# Altium PCB WikiAudio.PcbDoc
Units mil, origin at the board's own origin, x right, y up, seen from the top; angles counter-clockwise.
Board outline 1970 x 1955 mil, 2 copper layers (Top Layer, Bottom Layer); 92 components, 73 nets, 327 pads, 60 vias.
Unrouted connection lines stored in the file: 3.
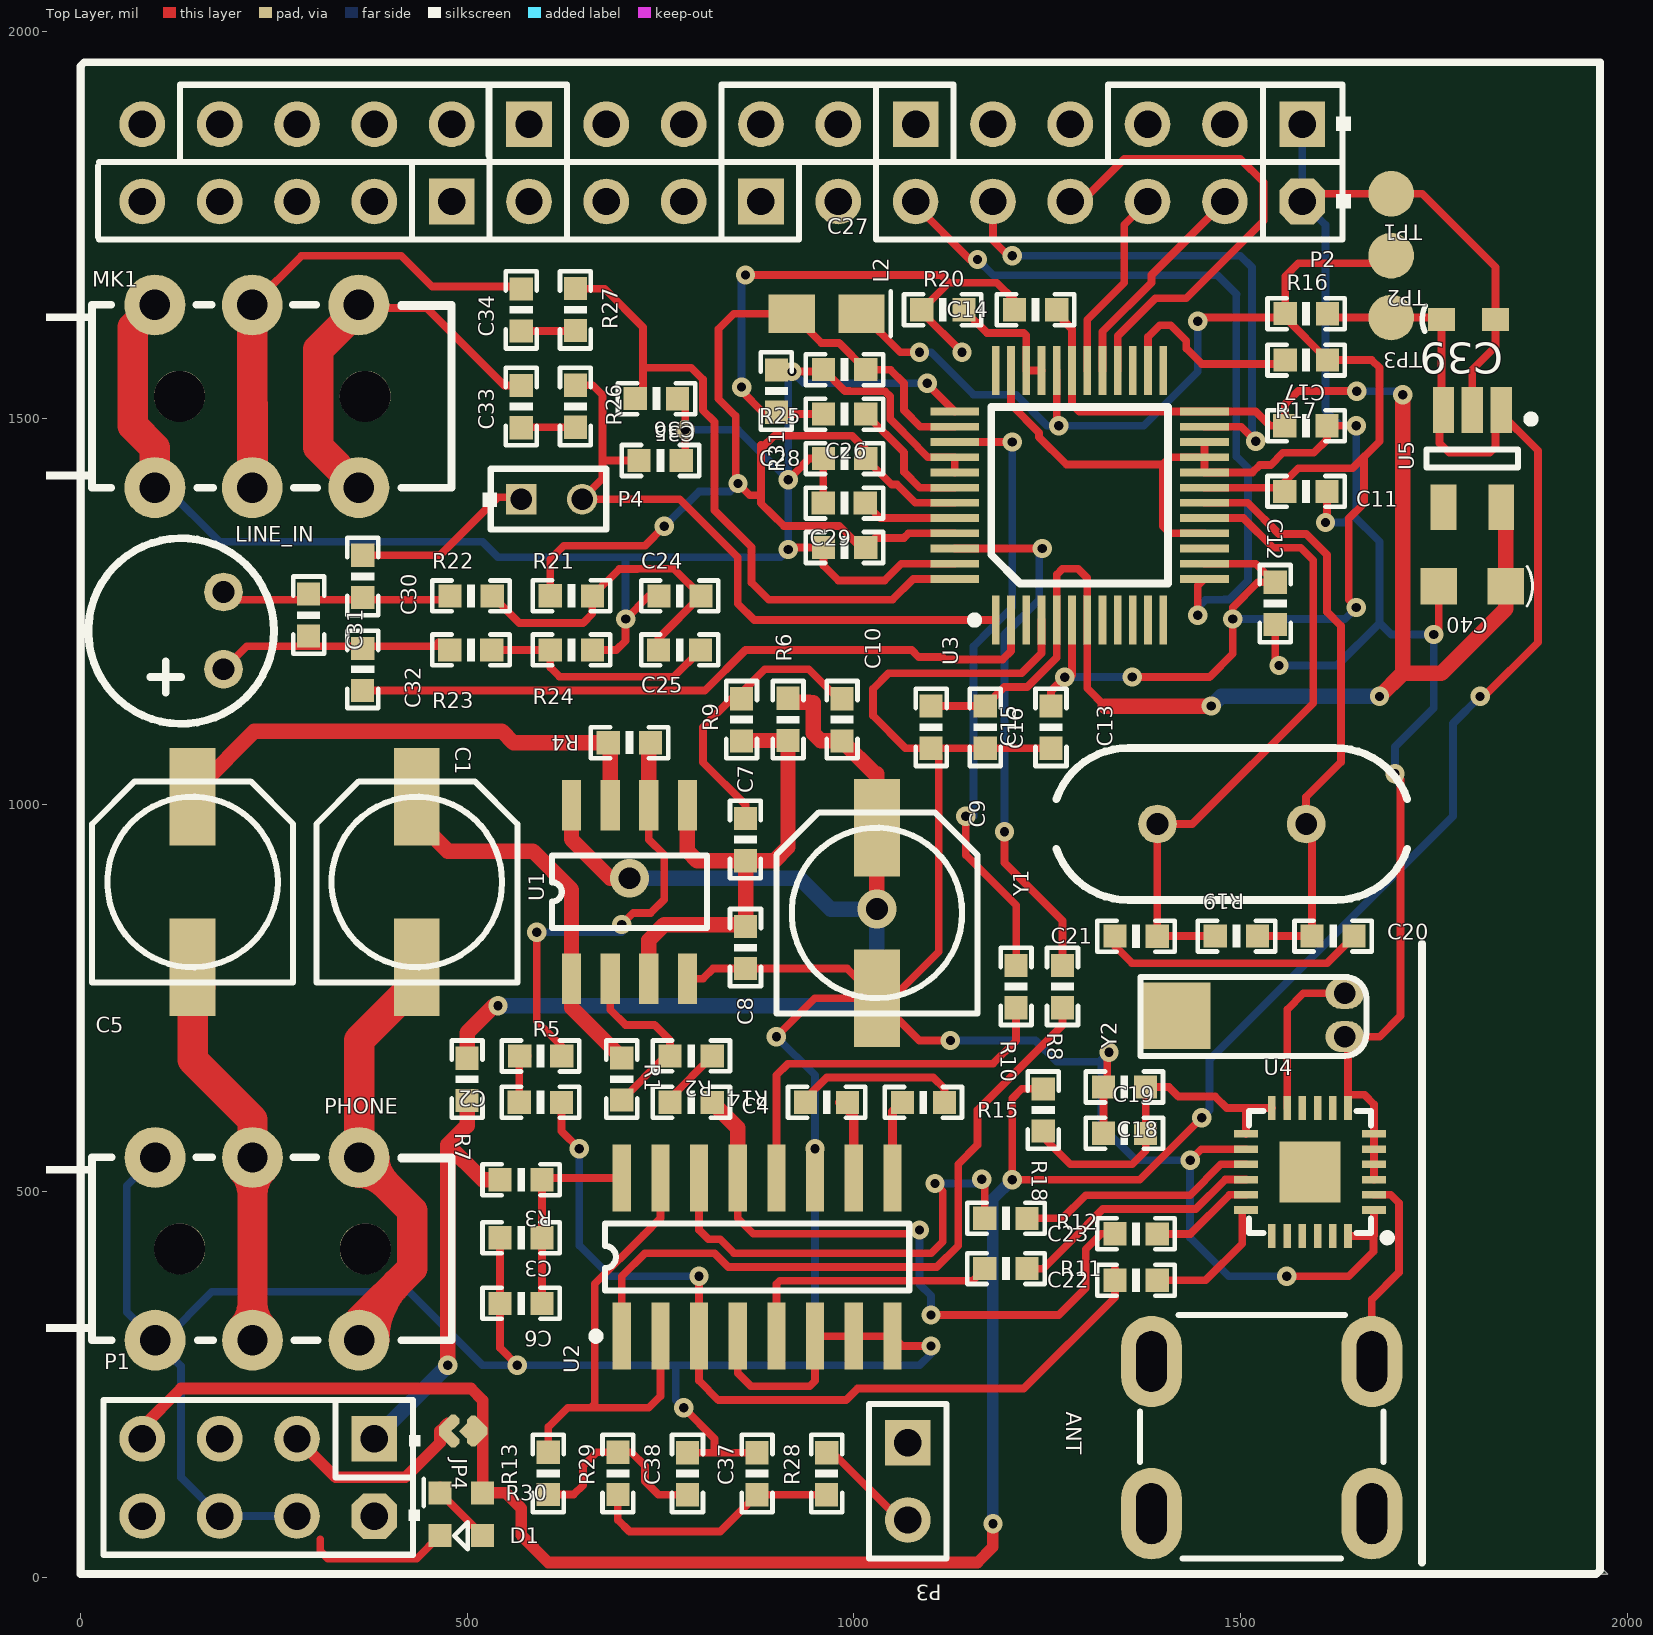
[diagram p0: Top Layer view]
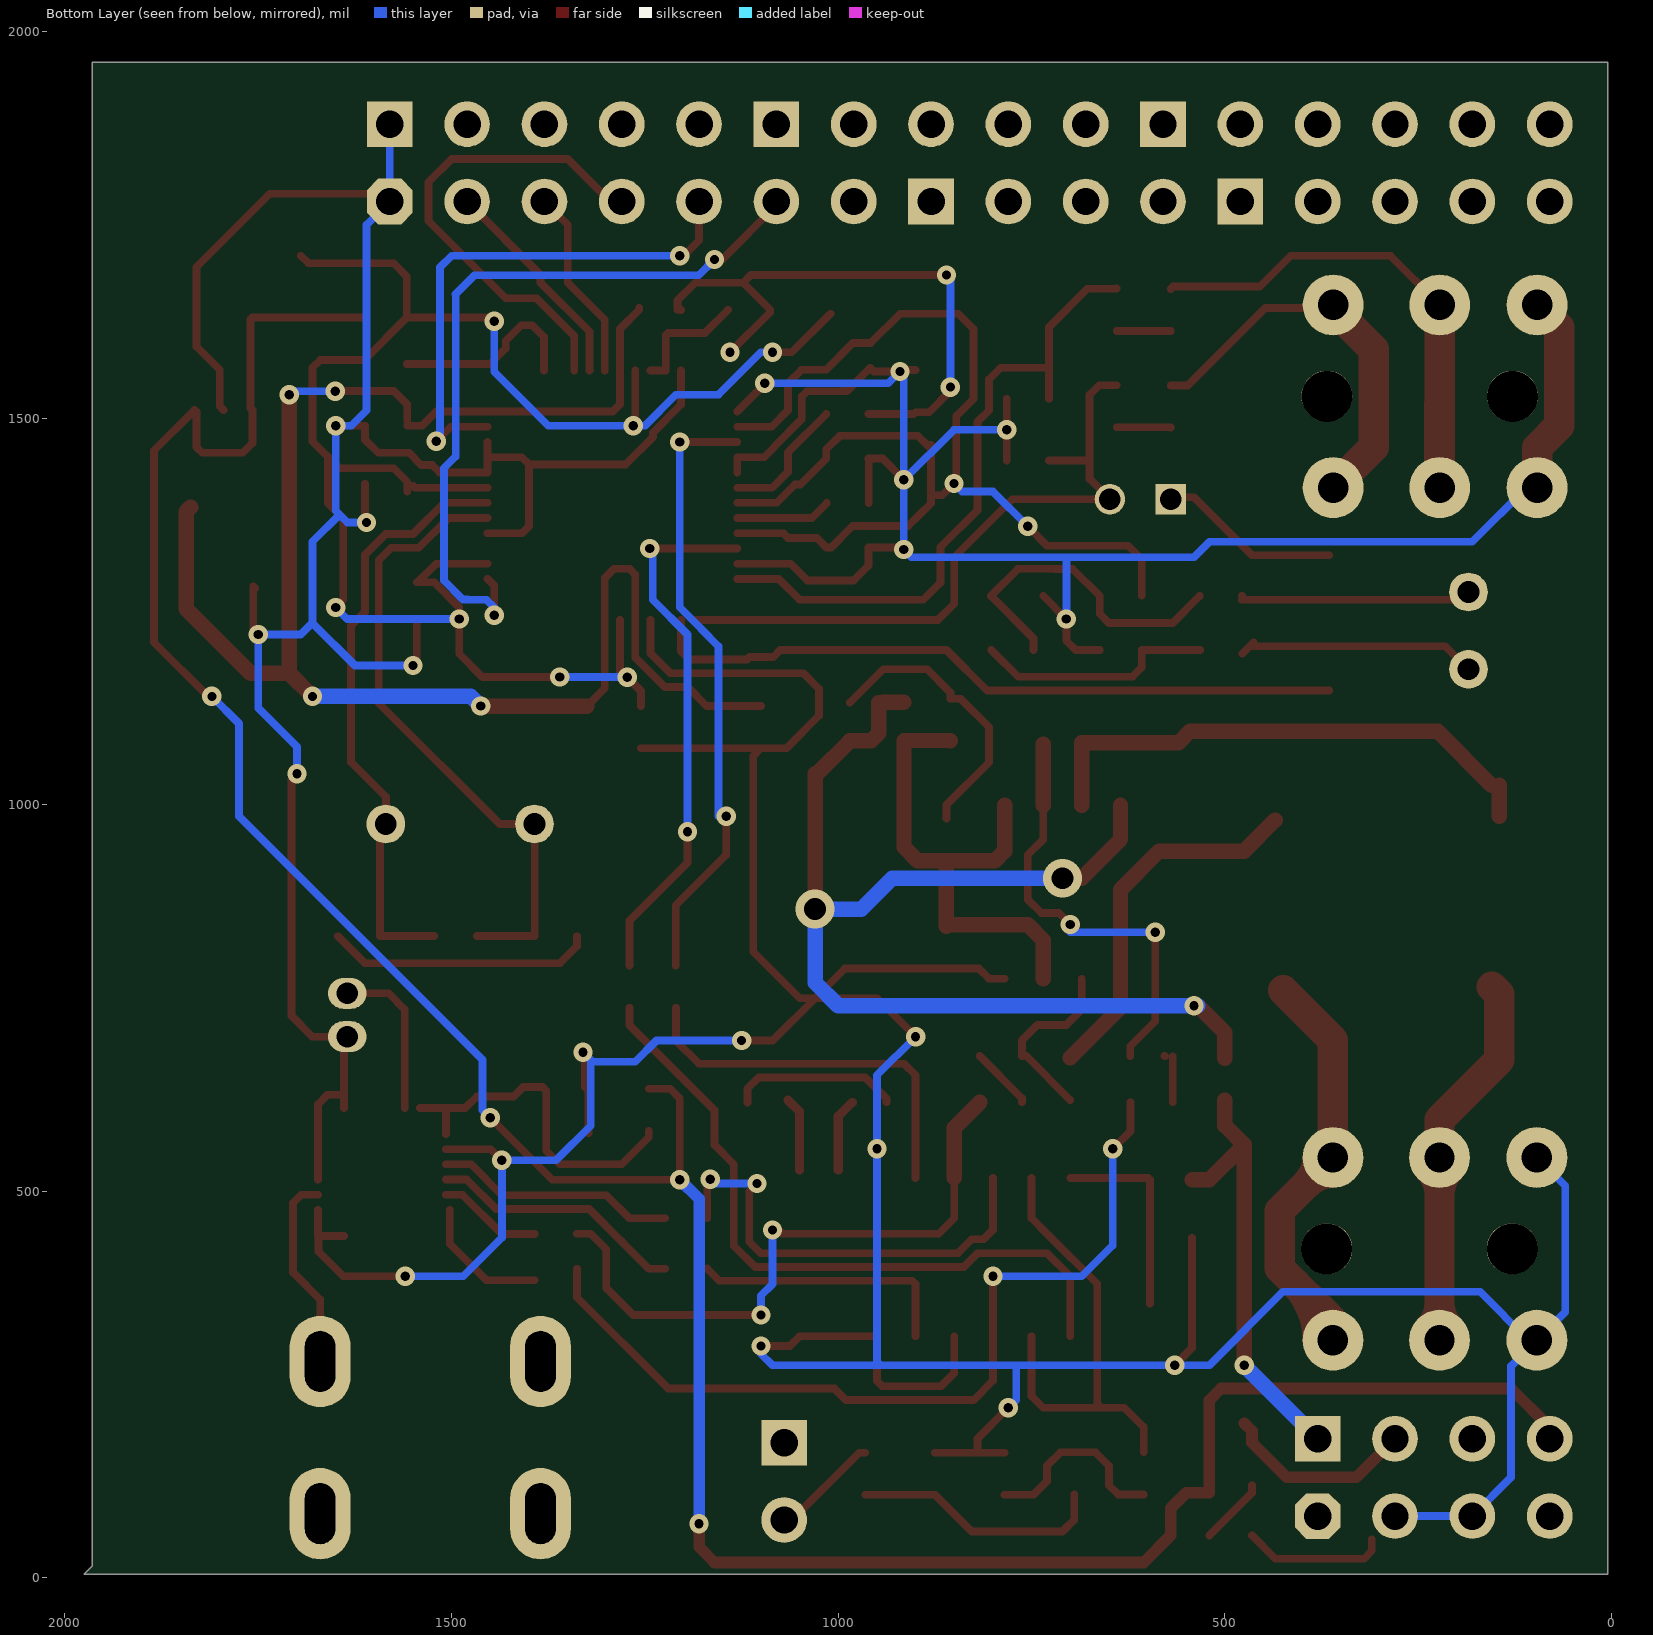
[diagram p1: Bottom Layer view, seen from below]

## Layer stack, top to bottom
Top Solder: solder mask 0.4, Solder Resist, Dk 3.5
Top Layer: signal copper 1.4
Dielectric1: dielectric 12.6, FR-4, Dk 4.8
Bottom Layer: signal copper 1.4
Bottom Solder: solder mask 0.4, Solder Resist, Dk 3.5

## Board outline
5,1960 5,5 1975,5 1965,15 1965,1960

## Design rules (kind name [scope] priority, off if disabled: settings)
Clearance [All] p1: gap=7.87
FabricationTestPointUsage TestPointUsage [All] p1: valid=0 allowmultiple=FALSE
FabricationTestpoint Testpoint [All] p1: side=3 testpointundercomponent=TRUE minsize=40 maxsize=100 preferedsize=60 minholesize=0 maxholesize=40 preferedholesize=32 testpointgrid=1 allowsidetop=TRUE allowsidebottom=TRUE usegrid=TRUE gridtolerance=0.01
PolygonConnect [All] p1: connectstyle=Relief reliefconductorwidth=10 reliefentries=4 polygonreliefangle="90 Angle" airgapwidth=10
RoomDefinition WikiAudio [InComponentClass('WikiAudio')] p1: confinementstyle=ConfineIn formatcopy=TRUE lockcomponents=FALSE outline 1965,1960 -85,1960 -85,-5 1965,-5
RoutingVias [All] p1: holewidth=12 width=25 viastyle="Through Hole" minholewidth=10 minwidth=25 maxholewidth=28 maxwidth=50
SilkToSolderMaskClearance SilkscreenOverComponentPads [IsPad] p1: minsilkscreentomaskgap=10 clearancetoexposedcopper=TRUE
SolderMaskExpansion [All] p1: expansion=4
Width [All] p1: maxlimit=78.74 minlimit=10 preferedwidth=10
27 further rules are at their usual default settings.

## Components (designator, comment, footprint, x,y, rotation, side; value= is the part's Value field where it differs from the comment)
ANT "PCB-11" PCB-11 1670,280 r180 top
C1 "220uF" CC6.56.5 435,900 r270 top
C2 "1UF" 0603P 595,615 r180 top
C3 "10UF" 0603P 570,440 r180 top
C4 "1UF" 0603P 790,615 r180 top
C5 "220uF" CC6.56.5 145,900 r270 top
C6 "104" 0603P 570,355 r180 top
C7 "10UF" 0603P 860,955 r270 top
C8 "10UF" 0603P 860,815 r90 top
C9 "220uF" CC6.56.5 1030,860 r270 top
C10 "104" 0603P 985,1110 r270 top
C11 "104" 0603P 1585,1405 r180 top
C12 "104" 0603P 1545,1260 r90 top
C13 "104" 0603P 1255,1100 r90 top
C14 "104" 0603P 1235,1640 r0 top
C15 "104" 0603P 1100,1100 r90 top
C16 "104" 0603P 1170,1100 r90 top
C17 "104" 0603P 1585,1490 r180 top
C18 "104" 0603P 1350,635 r0 top
C19 "10UF" 0603P 1350,575 r0 top
C20 "22" 0603P 1620,830 r180 top
C21 "22" 0603P 1365,830 r0 top
C22 "1UF" 0603P 1365,385 r0 top
C23 "1UF" 0603P 1365,445 r0 top
C24 "10UF" 0603P 775,1270 r0 top
C25 "10UF" 0603P 775,1200 r180 top
C26 "104" 0603P 988,1332.63 r0 top
C27 "104" 0603P 988,1562.63 r0 top
C28 "104" 0603P 988,1447.63 r0 top
C29 "1UF" 0603P 988,1390 r180 top
C30 "1UF" 0603P 365,1295 r90 top
C31 "1UF" 0603P 295,1245 r90 top
C32 "1UF" 0603P 365,1175 r270 top
C33 "1UF" 0603P 570,1515 r270 top
C34 "1UF" 0603P 570,1640 r270 top
C35 "103" 0603P 745,1525 r180 top
C36 "103" 0603P 750,1445 r180 top
C37 "102" 0603P 875.03,135 r270 top
C38 "101" 0603P 785.06,135 r270 top
C39 "100nF" C0603L 1795,1627.6 r0 top
C40 "10uF" C0805 1800,1282.6 r180 top
D1 "RED" 0603pn 520,55 r180 top
JP4 "Jumper2-2" JP2_SMD 495,190 r0 top
L2 "10uH" 0805 1010,1635 r180 top
LINE_IN "LINE_IN" PHONE_ST 228.11,1528.11 r180 top
MK1 "Mic2" Mic-6050 130,1225 r90 top
P1 "WIKIPWR-8P" WIKIPWR-8P 380,180 r180 top
P2 "WIKIPRHL-R" WIKIPRHL-R 1580,1880 r180 top locked
P3 "DAC" HDR1X2 1070,175 r270 top
P4 "MIC/LINE" HDR1X2/2.00MM 570,1395 r0 top
PHONE "PHONE_M" PHONE_ST 228.38,425.59 r180 top
R1 "10K" 0603P 700,645 r90 top
R2 "10K" 0603P 790,675 r180 top
R3 "10R" 0603P 570,515 r180 top
R4 "10K" 0603P 710,1080 r180 top
R5 "10K" 0603P 595,675 r0 top
R6 "10K" 0603P 915,1110 r90 top
R7 "10R" 0603P 500,645 r270 top
R8 "1K" 0603P 1270,765 r270 top
R9 "10K" 0603P 855,1110 r270 top
R10 "1K" 0603P 1210,765 r270 top
R11 "1K" 0603P 1197,400 r180 top
R12 "1K" 0603P 1197,465 r180 top
R13 "1K" 0603P 605,135 r90 top
R14 "10K" 0603P 965,615 r180 top
R15 "10K" 0603P 1090,615 r0 top
R16 "0R" 0603P 1585,1635 r0 top
R17 "100K" 0603P 1585,1575 r0 top
R18 "10R" 0603P 1245,605 r90 top
R19 "1M" 0603P 1495,830 r180 top
R20 "100K" 0603P 1115,1640 r0 top
R21 "1K" 0603P 635,1270 r180 top
R22 "1K" 0603P 505,1270 r0 top
R23 "1K" 0603P 505,1200 r180 top
R24 "1K" 0603P 635,1200 r180 top
R25 "1K" 0603P 988,1505.13 r0 top
R26 "510" 0603P 640,1515 r90 top
R27 "510" 0603P 640,1640 r90 top
R28 "4.7K" 0603P 965,135 r270 top
R29 "47K" 0603P 694.97,135 r90 top
R30 "1K" 0603M 465,110 r0 top
R31 "0R" 0603P 900,1535 r270 top
TP1 "TEST POINT" TP-1.5 1695,1790 r180 top
TP2 "TEST POINT" TP-1.5 1695,1710 r270 top
TP3 "TEST POINT" TP-1.5 1695,1629.94 r270 top
U1 "TDA1308T" SOP-8 635,775 r90 top
U2 "74HC4052" SOP16M 875,415 r0 top
U3 "VS1053B/VS1003B" mTQFP48 1235,1405 r90 top
U4 "RDA5820" QFN24 1590,525 r180 top
U5 "LDO-2.5" SOT23-5 1800,1447.6 r270 top
Y1 "12.288MHz" XTAL_US 1585,975 r180 top
Y2 "32.768KHz" XTAL32 1635,700 r180 top

## Footprints (in the part's own frame and the unit in brackets; to place one, negate y for a bottom-side part, rotate by r counter-clockwise, add the part's x,y. Pads: shape width x height; smd on the part's side, far side on the other; paste and mask are expansions set on the pad)
0603M [mil]
  rect 30x30 smd: 1(0,0) 2(55,0)
  silkscreen extent -21,-17 -21,18, body extent -5,-15 60,15, height 43
0603P [mil]
  rect 30x30 smd: 1(-27,0) 2(27.5,-0.06)
  silkscreen extent -50,-20 50,20
0603pn [mil]
  rect 30x30 smd: 1(0,0) 2(55,0)
  silkscreen extent 19,-17 36,18
0805 [mil]
  rect 60x50 smd: 1(0,0) 2(90,0)
  silkscreen extent -38,-29 -38,29
C0603L [mil]
  rect 35x30 smd: 1(-35,0) 2(35,0)
  silkscreen extent -60,-16 -56,18, body extent -31,-16 32,15, height 24
C0805 [mm]
  rect 1.2x1.2 smd: 1(-1.1,0) 2(1.1,0)
  silkscreen extent -1.97,-0.65 -1.8,0.65, body extent -0.99,-0.61 1.01,0.59, height 1.2
CC6.56.5 [mm]
  rect 3.2x1.5 smd: 1(-2.794,0) 2(2.8,0)
  silkscreen extent -3.3,-3.3 3.3,3.3
HDR1X2 [mm]
  rect 1.5x1.5 hole 0.9: 1(0,0)
  round 1.5 hole 0.9: 2(2.54,0)
  silkscreen extent -1.27,-1.27 3.81,1.27
HDR1X2/2.00MM [mm] "Connector; Header; 2 Position"
  rect 1x1 hole 0.7: 1(0,0)
  round 1 hole 0.7: 2(2,0)
  silkscreen extent -1.27,-1 2.79,1
JP2_SMD [mil]
  oct 15x30 smd rot 45: 1(-18,-8) 2(18,7)
  oct 15.75x30 smd rot 135: 1(-18,8)
  rect 26x26 smd rot 45: 2(13,0)
  oct 15x30 smd rot 135: 2(18,-7)
Mic-6050 [mil] "Mic 6050"
  round 50 hole 28: 1(-50,-55) 2(50,-55)
  silkscreen extent -120,-120 120,120
mTQFP48 [mm]
  rect 1.6x0.254 smd: 1(-4.223,1.3) 2(-4.223,0.8) 3(-4.223,0.3) 4(-4.223,-0.2) 5(-4.223,-0.7) 6(-4.223,-1.2) 7(-4.223,-1.7) 8(-4.223,-2.2) 9(-4.223,-2.7) 10(-4.223,-3.2) 11(-4.223,-3.7) 12(-4.223,-4.2) 25(3.977,-4.2) 26(3.977,-3.7) 27(3.977,-3.2) 28(3.977,-2.7) 29(3.977,-2.2) 30(3.977,-1.7) 31(3.977,-1.2) 32(3.977,-0.7) 33(3.977,-0.2) 34(3.977,0.3) 35(3.977,0.8) 36(3.977,1.3)
  rect 0.254x1.6 smd: 13(-2.873,-5.55) 14(-2.373,-5.55) 15(-1.873,-5.55) 16(-1.373,-5.55) 17(-0.873,-5.55) 18(-0.373,-5.55) 19(0.127,-5.55) 20(0.627,-5.55) 21(1.127,-5.55) 22(1.627,-5.55) 23(2.127,-5.55) 24(2.627,-5.55) 37(2.627,2.65) 38(2.127,2.65) 39(1.627,2.65) 40(1.127,2.65) 41(0.627,2.65) 42(0.127,2.65) 43(-0.373,2.65) 44(-0.873,2.65) 45(-1.373,2.65) 46(-1.873,2.65) 47(-2.373,2.65) 48(-2.873,2.65)
  silkscreen extent -4.35,-4.35 2.78,2.12
PCB-11 [mm]
  oval 2x3 hole 1 slot 2 at 90 deg: 1(0,0) 2(7.239,0) 3(7.239,5) 4(0,5)
  silkscreen extent -0.38,-1.52 7.62,6.48
PHONE_ST [mm]
  round 1.676 hole 1.676: 0(-3.556,0) 0(2.54,0)
  round 2 hole 1: 1(-3.35,3) 1(-3.35,-3) 2(0.15,-3) 2(0.15,3) 3(3.35,3) 3(3.35,-3)
  silkscreen extent -6.39,-3.01 7.49,3
QFN24 [mm]
  rect 2x2 smd: 0(0,0)
  rect 0.8x0.25 smd: 1(-2.101,1.25) 2(-2.101,0.75) 3(-2.101,0.25) 4(-2.101,-0.25) 5(-2.101,-0.75) 6(-2.101,-1.25) 13(2.101,-1.25) 14(2.101,-0.75) 15(2.101,-0.25) 16(2.101,0.25) 17(2.101,0.75) 18(2.101,1.25)
  rect 0.25x0.8 smd: 7(-1.25,-2.101) 8(-0.75,-2.101) 9(-0.25,-2.101) 10(0.25,-2.101) 11(0.75,-2.101) 12(1.25,-2.101) 19(1.25,2.101) 20(0.75,2.101) 21(0.25,2.101) 22(-0.25,2.101) 23(-0.75,2.101) 24(-1.25,2.101)
  silkscreen extent -2.66,-2 2,2.28
SOP16M [mm]
  rect 0.6x2.2 smd: 1(-4.445,-2.6) 2(-3.175,-2.6) 3(-1.905,-2.6) 4(-0.635,-2.6) 5(0.635,-2.6) 6(1.905,-2.6) 7(3.175,-2.6) 8(4.445,-2.6) 9(4.445,2.6) 10(3.175,2.6) 11(1.905,2.6) 12(0.635,2.6) 13(-0.635,2.6) 14(-1.905,2.6) 15(-3.175,2.6) 16(-4.445,2.6)
  silkscreen extent -5.42,-2.72 5,1.1
SOP-8 [mil]
  rect 65x25 smd: 1(0,0) 2(0,-50) 3(0,-100) 4(0,-150) 5(224.41,-150) 6(224.41,-100) 7(224.41,-50) 8(224.41,0)
  silkscreen extent 65,-175 159,25
SOT23-5 [mm]
  rect 1.5x0.7 smd: 1(-1.595,0.95) 2(-1.595,0) 3(-1.595,-0.95)
  rect 1.5x0.85 smd: 4(1.595,-0.95) 5(1.595,0.95)
  silkscreen extent -1.42,-1.5 0.3,2.05, body extent -1.39,-1.46 1.41,1.44, height 1.09
TP-1.5 [mm]
  round 1.5 smd: 1(0,0)
WIKIPRHL-R [mm] "Connector; Header; 16x2 Position"
  rect 1.5x1.5 hole 0.9: 1(0,0) 11(12.7,0) 16(17.78,2.54) 21(25.4,0) 24(27.94,2.54)
  oct 1.5x1.5 hole 0.9: 2(0,2.54)
  round 1.5 hole 0.9: 3(2.54,0) 4(2.54,2.54) 5(5.08,0) 6(5.08,2.54) 7(7.62,0) 8(7.62,2.54) 9(10.16,0) 10(10.16,2.54) 12(12.7,2.54) 13(15.24,0) 14(15.24,2.54) 15(17.78,0) 17(20.32,0) 18(20.32,2.54) 19(22.86,0) 20(22.86,2.54) 22(25.4,2.54) 23(27.94,0) 25(30.48,0) 26(30.48,2.54) 27(33.02,0) 28(33.02,2.54) 29(35.56,0) 30(35.56,2.54) 31(38.1,0) 32(38.1,2.54)
  silkscreen extent -1.6,-1.3 39.55,3.78, body extent -1.3,-1.63 39.43,4.04, height 8.51
WIKIPWR-8P [mm] "Connector; Header; 4x2 Position"
  rect 1.5x1.5 hole 0.9: 1(0,0)
  oct 1.5x1.5 hole 0.9: 2(0,2.54)
  round 1.5 hole 0.9: 3(2.54,0) 4(2.54,2.54) 5(5.08,0) 6(5.08,2.54) 7(7.62,0) 8(7.62,2.54)
  silkscreen extent -1.52,-1.27 8.89,3.81, body extent -1.28,-1.65 8.81,4.07, height 8.51
XTAL32 [mil]
  oval 50x40 hole 28: 1(0,0) 2(0,-56)
  rect 92.13x86 smd: ""(220,-27)
  silkscreen extent -28,-77 264,25
XTAL_US [mil]
  round 50 hole 28: 1(0,0) 2(192.13,0)
  silkscreen extent -131,-98 323,98

## Part data
ANT: "PCB接线端子"
C1 C5 C9: library part CAP
C2 C3 C4 C6 C7 C8 C10 C11 C12 C13 C14 C15 C16 C17 C18 C19 C20 C21 C22 C23 C24 C25 C26 C27 C28 C29 C30 C31 C32 C33 C34 C35 C36 C37 C38: library part C
C39 C40: library part Cap, "Capacitor"
D1: library part LED0, "Typical INFRARED GaAs LED"
JP4: "Jumper2"
L2: library part Inductor, "Inductor"
LINE_IN: library part PHONE_M
MK1: "Microphone"
P1: "PWR HDR"
P2: "Header, 16-Pin, Dual row"
P3 P4: library part "Header 2", "Header, 2-Pin"
R1 R2 R3 R4 R5 R6 R7 R8 R9 R10 R11 R12 R13 R14 R15 R16 R17 R18 R19 R20 R21 R22 R23 R24 R25 R26 R27 R28 R29 R31: library part R
R30: library part Res2, "Resistor"
TP1 TP2 TP3: library part TEST-POINT, "测试点"
U1: library part TDA1308
U2: library part CD4052
U3: library part VS1053
U5: library part LDO-SOT23-5, "General LDO SOT23-5"
Y1: library part XTAL_2, "Crystal Oscillator"
Y2: library part XTAL_3, "32.768K"

## Via types
v1: diameter 25, hole 12, Top Layer to Bottom Layer, 58 vias
v2: diameter 50, hole 28, Top Layer to Bottom Layer, 2 vias

## Nets (pads, with @x,y where several pads share a name; then routed paths per layer and width w, separated by ;. In a path a pad name is that pad's centre, name@x,y a point inside that pad or via, vN(x,y) a via of type N, cw(c..) or ccw(c..) an arc to the next point about the centre after c; other vN are vias at no path point)
"A OUTL": C2.2 R5.1 | length 60.1
  Top Layer w10: C2.2 R5.1@567.5,674.5 ; R5.1@577.5,674.5 R5.1@578,675
"A OUTR": C4.2 R2.1 | length 82.5
  Top Layer w10: C4.2 762.5,620.5 R2.1
AGND: C24.1 C26.1 C27.1 C28.1 C29.2 C35.1 C36.1 LINE_IN.3 R24.1 R31.1 U3.37 U3.40 U3.41 U3.47 | length 2720.8
  Top Layer w10: R24.1 693,1200 705,1212 v1(705,1240) C24.1@735,1270 ; C36.1@782,1445 v1(782,1485) C35.1@782,1525 ; R31.1 918.26,1562 v1(920.13,1560.13) 953.76,1560.13 958.63,1565 C27.1 988.63,1535 994.86,1535 995.17,1534.69 1040.31,1534.69 1047.13,1527.87 1047.13,1498.72 1082.87,1462.97 1082.87,1462.15 1095.65,1449.37 U3.40 U3.41 ; v1(915.26,1330) 912.63,1332.63 C26.1 961,1309 980,1290 1040,1290 1061.58,1311.58 U3.47 ; v1(915.26,1420) 915.26,1420.26 942.63,1447.63 C28.1 960.5,1447.13 C29.2 ; v1(1095,1545) 1094.09,1545 U3.37
  Top Layer w39.37: LINE_IN.3@96.22,1410 96.22,1461.62 67.55,1490.29 67.55,1617.55 LINE_IN.3@96.22,1646.22
  Bottom Layer w10: LINE_IN.3@96.22,1410 110,1410 180,1340 520,1340 540,1320 705,1320 ; v1(705,1240) 705,1320 ; v1(782,1485) 850.26,1485 v1(915.26,1420) ; v1(1095,1545) 935.26,1545 v1(920.13,1560.13) 915.26,1555.26 v1(915.26,1420) ; 705,1320 905.26,1320 v1(915.26,1330) v1(915.26,1420)
AREF: C7.2 C8.2 R6.1 R9.2 U1.3 U1.5 | length 669.5
  Top Layer w20: U1.3 735,825 755,845 857.56,845 C8.2 860.06,927.37 C7.2 ; U1.5 785,940 797.5,927.5 C7.2 ; R9.2 855.44,1083 R6.1 915,945 897.5,927.5 C7.2
"ASEL A": R14.1 U2.10 | length 95.1
  Top Layer w11.81: R14.1@982,615 1000,597 U2.10@1000,527.36
"ASEL B": R15.1 U2.9 | length 96.9
  Top Layer w11.81: U2.9@1050,527.36 1050,603 R15.1@1065,618
AVDD: C26.2 C27.2 C28.2 L2.2 R21.2 U3.38 U3.43 U3.45 | length 1611.7
  Top Layer w10: R21.2 607.5,1317.5 625,1335 730,1335 v1(755,1360) ; 880,1465 880,1400 ; 882.5,1462.5 897.19,1477.19 997.81,1477.19 1015.5,1459.5 C28.2 1049.12,1413.94 1056.06,1413.94 1079.68,1390.32 U3.43 ; U3.45 1070.95,1350.95 1065,1345 1027.94,1345 C26.2 1009.27,1332.56 981.33,1360.5 909.5,1360.5 894.75,1375.25 880,1390 880,1400 ; U3.38 1086.26,1488.74 1065,1510 1065,1545 1047.44,1562.56 C27.2 980.94,1597.13 957.87,1597.13 L2.2 845,1635 825,1615 825,1525 847.5,1502.5 847.5,1418.12 v1(850.37,1415.25) 865.62,1400 880,1400
  Bottom Layer w10: v1(755,1360) 800,1405 840,1405
"CD X0": R10.2 U2.12 | length 503.8
  Top Layer w10: U2.12 900,650 915,665 1180,665 1209.94,694.94 R10.2
"CD X1": R12.2 U2.14 | length 597.4
  Top Layer w10: U2.14 800,450 812.13,437.87 827.4,437.87 845.28,420 1100,420 1115,435 1115,500 v1(1105,510) ; v1(1165.5,515.5) 1169.5,515.5 R12.2
  Bottom Layer w10: v1(1105,510) 1160,510 v1(1165.5,515.5)
"CD XY2": R13.2 U2.2 U2.15 | length 606.5
  Top Layer w10: R13.2 605.06,195.06 630,220 660,220 ; U2.2 750,235 735,220 660,220 ; U2.15 750,465 727.87,442.87 727.6,442.87 665,380.28 665,225 660,220
"CD Y0": R8.2 U2.1 | length 907.3
  Top Layer w10: U2.1 700,390 730,420 820,420 837.87,402.13 1107.4,402.13 1135,429.72 1135,535 1160,560 1160,605 1269.94,714.94 R8.2
"CD Y1": R11.2 U2.5 | length 345.2
  Top Layer w10: U2.5 900,380 904.25,384.25 1153.69,384.25 R11.2
CVDD: C14.2 C15.2 C16.2 C17.2 C40.1 U3.5 U3.7 U3.24 U3.31 U5.5 | length 2188.6
  Top Layer w10: C15.2 C16.2 1194.69,1152.13 1224.32,1152.13 1262.56,1190.37 U3.5 1262.56,1297.56 1270,1305 1290,1305 1301.93,1293.07 U3.7 1301.93,1150.57 1325,1127.5 ; C14.2@1257.5,1642.5 1257.5,1639.94 1282.24,1615.19 U3.31 1282.24,1517.76 1291.57,1508.43 U3.24 1520,1508.43 1538.36,1490.06 C17.2 ; C17.2@1557.5,1495.06 1557.5,1517.5 1575,1535 1650,1535 v1(1650.44,1534.56)
  Top Layer w20: 1325,1127.5 v1(1462.5,1127.5) ; v1(1680,1140) 1710,1170 ; v1(1710,1530) 1710,1170 ; U5.5 1843.31,1378.9 C40.1 1843.31,1253.31 1760,1170 1710,1170
  Bottom Layer w10: v1(1650.44,1534.56) 1705.44,1534.56 v1(1710,1530)
  Bottom Layer w20: v1(1462.5,1127.5) 1475,1140 v1(1680,1140)
D3V3: R14.2 R15.2 | length 219.6
  Top Layer w10: R14.2 937.5,619.63 965,647.13 1102.87,647.13 1117.5,632.5 R15.2
D5V: P1.1 R3.2 R7.2 | length 573.3
  Top Layer w20: v1(475,275) 475,560 ; R7.2 499.94,584.94 475,560 ; R3.2 519.94,515.06 475,560
  Bottom Layer w20: P1.1 v1(475,275)
GBUF: R25.2 U3.42 | length 169.4
  Top Layer w10: R25.2 1065,1455.56 1065,1430.28 1085.28,1410 U3.42
GND: C3.2 C6.2 C7.1 C8.1 C9.2 C10.1 C11.1 C12.1 C13.1 C14.1 C15.1 C16.1 C17.1 C18.1 C19.1 C20.1 C21.1 C37.1 C38.1 C39.2 C40.2 D1.2 P1.4 P1.6 P2.1 P2.2 PHONE.3 R9.1 R20.1 R25.1 R31.2 TP1.1 U1.4 U2.4 U2.6 U2.7 U2.8 U2.11 U3.4 U3.16 U3.20 U3.21 U3.22 U3.35 U4.1 U4.3 U4.4 U4.5 U4.6 U4.7 U4.14 U4.24 U5.2 Y2.1 | length 10179.6
  Top Layer w10: C3.2 C6.2 542.5,297.5 v1(565,275) ; v1(780,220) 820,180 820,162 ; U1.4 805,775 818,788 C8.1 991.76,788 C9.2 ; C38.1 820,162 ; U2.4 850,265 867.13,247.87 942.87,247.87 950,255 U2.6 U2.8 1062.64,300 v1(1100,300) ; v1(855,1540) 855,1535 882.5,1507.5 R31.2 902.31,1505.13 R25.1 ; C7.1 860,1000 805,1055 805,1100 842,1137 R9.1 855,1145 885,1175 942,1175 C10.1@985,1132 ; v1(860,1685) 1113,1685 1123,1675 ; C37.1 820,162 ; v1(900,700) 949.76,749.76 C9.2 ; v1(1125,695) 1084.76,695 C9.2 ; v1(1140,1585) 1088,1637 R20.1 1123,1675 ; C14.1@1203,1640 C14.1@1203.5,1639.5 ; U3.35 1203.5,1517.24 1239.63,1481.12 1239.63,1475.37 1275,1440 1400,1440 ; C14.1 1208,1652 1185,1675 1123,1675 ; U3.4 1242.87,1195.96 1216.91,1170 1045,1170 1025,1150 1025,1115 1067,1073 C15.1 ; C13.1 C15.1 ; C19.1 1323,630 1328,635 1328,678 v1(1330,680) ; C21.1 1338,817 1360,795 1612,795 C20.1 ; v1(1435,540) 1449.25,554.25 1449.25,554.53 U4.14 ; U3.16 1409.05,1350.95 1400,1360 1400,1440 ; U3.22 U3.21 ; C12.1 1545,1185 v1(1550,1180) ; v1(1560,390) 1640,390 1672.28,422.28 1672.28,442.28 ; P2.2 1590,1790 1735,1790 1830,1695 C39.2 1830,1592.6 1800,1562.6 1800,1515.39 U5.2@1795,1510.39 ; v1(1610,1365) 1612,1367 C11.1@1612,1415 ; Y2.1 Y2.1@1639.21,700 ; U4.24 1672.28,442.28 ; U4.7 Y2.1@1639.21,700 ; 1645,625 1660.45,625 1672.72,612.72 U4.4 U4.3 ; v1(1650,1490) C17.1 1612,1472 1595,1455 1555,1455 1539.12,1439.12 1525,1439.12 1515.57,1429.69 U3.20 U3.21 ; U4.1 1672.72,442.72 1672.28,442.28 ; v1(1700,1040) 1707,1033 1707,727 1680,700 Y2.1@1639.21,700 ; v1(1750,1220) 1756.69,1226.69 C40.2 C40.2@1754.13,1280.03 ; C9.2 1049.76,749.76 1110,810 1110,1063 C15.1 ; 1400,1440 1409.37,1449.37 U3.21
  Bottom Layer w10: PHONE.3@96.49,543.7 60,507.2 60,343.97 PHONE.3@96.49,307.48 ; P1.4 P1.6 130,130 130,273.97 PHONE.3@96.49,307.48 ; v1(780,220) 770,230 770,275 ; v1(855,1540) 855,1685 v1(860,1685) ; v1(900,700) 950,650 v1(950,555) 950,280 945,275 ; v1(1100,300) 1100,290 1085,275 945,275 ; v1(1125,695) 1235,695 1262.5,667.5 1317.5,667.5 1320,670 ; v1(1330,680) 1320,670 ; v1(1550,1180) 1625,1180 1680,1235 ; v1(1560,390) 1485,390 1435,440 v1(1435,540) 1365,540 1320,585 1320,670 ; P2.1 P2.2 1610,1750 1610,1510 1630,1490 v1(1650,1490) 1650,1380 1645,1375 ; v1(1610,1365) 1635,1365 1645,1375 ; v1(1700,1040) 1700,1075 1750,1125 v1(1750,1220) 1695,1220 1680,1235 ; PHONE.3@96.49,307.48 107.48,307.48 170,370 425,370 520,275 v1(565,275) 770,275 ; 770,275 945,275 ; 1645,1375 1680,1340 1680,1235
"IIC SCL": U4.9
"IIC SDA": U4.10
IOVDD: C11.2 C12.2 C13.2 L2.1 R16.1 R17.2 TP2.1 U3.6 U3.14 U3.19 U3.32 | length 2425.2
  Top Layer w10: L2.1 1060,1585 v1(1085,1585) ; C13.2 1255.06,1146.99 v1(1272.95,1164.87) ; U3.32 1262.56,1492.44 v1(1265,1490) ; v1@1282.24,1167.24 U3.6 ; v1(1360,1165) 1460,1165 1490,1195 v1(1490,1240) 1490,1255 1522.5,1287.5 C12.2@1544.08,1287.5 ; v1(1445,1625) 1450,1630 1558,1630 R17.2@1612.5,1575.5 ; U3.14 1520,1311.58 C12.2@1544.08,1287.5 ; U3.19 1547.44,1410 C11.2@1550,1412.56 ; C12.2 C12.2@1544.08,1287.5 ; C11.2 1557.5,1417.5 1575,1435 1645,1435 1680,1470 1680,1565 1670.06,1574.94 R17.2 ; R16.1 1558,1683 1575,1700 1685,1700 TP2.1 ; v1(1650,1255) 1640,1265 1640,1370 1660,1390 1660,1450
  Bottom Layer w10: v1(1085,1585) 1100,1585 1155,1530 1210,1530 1250,1490 v1(1265,1490) 1375,1490 1445,1560 v1(1445,1625) ; v1(1272.95,1164.87) 1270.13,1164.87 1270,1165 v1(1360,1165) ; v1(1490,1240) 1635,1240 v1(1650,1255)
LRCK: U3.36
MCLK: U3.25
"MP3 LEFT": R8.1 U3.46 | length 706.1
  Top Layer w10: U3.46 v1(1243.74,1331.26) ; v1(1195,965) 1195,925 1270,850 R8.1
  Bottom Layer w10: v1(1195,965) 1195,1220 1240,1265 1240,1327.52 v1(1243.74,1331.26) v1@1241.26,1331.26
"MP3 RIGHT": R10.1 U3.39 | length 799
  Top Layer w10: U3.39 v1(1205,1469.06) ; v1(1145,985) 1145,935 1210,870 R10.1
  Bottom Layer w10: v1@1155,985 1155,1205 1177.13,1227.13 1177.13,1227.4 1205,1255.28 v1(1205,1469.06)
NetANT_1: ANT.1 ANT.2 ANT.3 ANT.4 U4.2 | length 246.1
  Top Layer w10: ANT.1@1670,290 1670,360 1705,395 1705,485 1694.53,495.47 U4.2
NetC1_1: C1.1 R1.2 U1.1 | length 481.7
  Top Layer w20: C1.1@435,980 475,940 585,940 635,890 U1.1 635,737.56 R1.2
NetC1_2: C1.2 PHONE.1 | length 694
  Top Layer w39.37: PHONE.1@360.27,307.48 360.27,331.83 428.94,400.5 428.94,475.03 360.27,543.7 360.27,695.27 C1.2@424.76,759.76 ; PHONE.1@360.27,524.01 cw(c360.27,476.49) 393.88,510.09 cw(c427.48,543.7) PHONE.1@379.96,543.7 ; PHONE.1@379.96,307.48 cw(c486.28,307.48) 411.1,382.66
NetC3_1: C3.1 C6.1 R3.1 U2.16 | length 264
  Top Layer w10: C6.1 R3.1 599.36,517.36 U2.16
NetC5_1: C5.1 R4.2 U1.7 | length 685.8
  Top Layer w20: C5.1@145,985 C5.1@145,1025 ; C5.1@155,1025 225,1095 545,1095 560,1080 685,1080 U1.7
NetC5_2: C5.2 PHONE.2 | length 642.8
  Top Layer w39.37: C5.2@155,764.76 145,754.76 145,670 222.48,592.52 222.48,543.7 PHONE.2@222.48,307.48 ; PHONE.2@208.56,321.4 ccw(c174.95,355) 222.48,355 ccw(c270,355) PHONE.2@236.4,321.4 ; PHONE.2@208.56,529.78 cw(c174.95,496.17) 222.48,496.17 cw(c270,496.17) PHONE.2@236.4,529.78
NetC18_2: C18.2 C19.2 R18.1 U4.12 U4.13 | length 450.8
  Top Layer w10: R18.1 1245,570 1280,535 1360,535 1377.5,552.5 C19.2 1377.5,629.94 1382.5,634.94 1407.56,634.94 1420,622.5 1467.5,622.5 1482.28,607.72 1509.55,607.72 ; U4.13 1507.28,605.45 1509.55,607.72 ; U4.12 1509.55,607.72
NetC20_2: C20.2 R19.1 U3.18 Y1.1 | length 768.2
  Top Layer w10: U3.18 1509.68,1390.32 1550,1350 1585.28,1350 1612,1323.28 1612,1249.24 1630,1231.24 1630,1055 1585,1010 Y1.1 ; R19.1@1522.44,830 1522.5,830.06 C20.2 Y1.1@1592.5,967.5
NetC21_2: C21.2 R19.2 U3.17 Y1.2 | length 828.8
  Top Layer w10: C21.2 Y1.2@1392.5,974.63 ; Y1.2 1437.87,975 1594.13,1131.25 1594.13,1315.87 1577.87,1332.13 1542.6,1332.13 1504.09,1370.63 U3.17 ; C21.2@1397.37,829.94 1397.5,830.06 R19.2
NetC22_2: C22.2 U4.18 | length 172.9
  Top Layer w10: C22.2 1454.94,384.94 1502.28,432.28 U4.18@1502.28,475.79
NetC23_2: C23.2 U4.17 | length 135.7
  Top Layer w10: C23.2 1435.49,444.94 1486.03,495.47 U4.17
NetC24_2: C24.2 C25.2 R21.1 R22.2 | length 449.1
  Top Layer w10: R22.2 567.44,1235 650,1235 662,1247 R21.1 696.63,1304.63 719.9,1304.63 ; 704.9,1304.63 705.28,1305 767.44,1305 C24.2 747.5,1214.94 C25.2
NetC25_1: C25.1 R23.1 R24.2 | length 312
  Top Layer w10: R23.1 607.44,1200 R24.2 607.5,1177.5 619.63,1165.37 767.37,1165.37 C25.1
NetC29_1: C29.1 U3.44 | length 123.7
  Top Layer w10: C29.1 1034.37,1370.63 U3.44
NetC30_1: C30.1 C31.2 MK1.2 R22.1 | length 297.1
  Top Layer w10: MK1.2 195,1265 R22.1@478,1265
NetC30_2: C30.2 P4.1 | length 233.5
  Top Layer w10: C30.2 465,1322.5 540,1397.5 P4.1@567.5,1397.5
NetC31_1: C31.1 C32.1 MK1.1 R23.2 | length 314.6
  Top Layer w10: MK1.1@185,1170 MK1.1@187.5,1172.5 ; MK1.1 215,1205 R23.2@462.56,1205 ; R23.2@462.56,1210 R23.2@477.5,1195.06
NetC32_2: C32.2 U3.2 | length 909.8
  Top Layer w10: C32.2 807.5,1147.5 860,1200 1075,1200 1084.19,1190.81 1114.87,1190.81 1117.81,1187.87 1192.6,1187.87 1203.5,1198.78 U3.2
NetC33_1: C33.1 LINE_IN.1 | length 533.3
  Top Layer w10: LINE_IN.1@342.53,1642.31 447.69,1642.31 548,1542 C33.1
  Top Layer w39.37: LINE_IN.1@352.71,1633.83 307.55,1588.67 307.55,1462.45 LINE_IN.1@360,1410
NetC33_2: C33.2 R26.1 | length 70.3
  Top Layer w10: C33.2 570.44,1488 R26.1
NetC34_1: C34.1 LINE_IN.2 | length 749.6
  Top Layer w10: LINE_IN.2@224.09,1648.11 285.98,1710 415,1710 455,1670 567,1670 C34.1
  Top Layer w39.37: LINE_IN.2@222.2,1410 LINE_IN.2@222.2,1646.22 ; LINE_IN.2@223.11,1394.09 223.11,1518.11
NetC34_2: C34.2 R27.1 | length 70.3
  Top Layer w10: C34.2 639.5,1612.5 R27.1
NetC35_2: C35.2 R27.2 U3.48 | length 856.3
  Top Layer w10: R27.2 640.37,1667.19 677.81,1667.19 727.5,1617.5 727.5,1565 ; C35.2@727.5,1525.06 727.5,1565 ; U3.48 1076.89,1291.89 1050,1265 890,1265 867.87,1287.13 867.87,1332.78 820,1380.65 820,1495 805,1510 805,1550 790,1565 727.5,1565
NetC36_2: C36.2 P4.2 R26.2 U3.1 | length 873.5
  Top Layer w10: R26.2 662.5,1542.5 675,1530 675,1445 ; C36.2@727.5,1445.06 675.06,1445.06 675,1445 ; U3.1 871.26,1238.74 850,1260 850,1320 775,1395 P4.2 675,1421.26 675,1445
NetC37_2: C37.2 R28.2 R29.1 | length 328.8
  Top Layer w10: R29.1 694.97,75.03 710,60 827.47,60 C37.2 R28.2
NetD1_1: D1.1 R30.1 | length 87.8
  Top Layer w10: R30.1@465,120 R30.1 D1.1
NetJP4_1: JP4.1 P1.3 | length 253.5
  Top Layer w15: P1.3 330,130 420,130 465,175 465,190 JP4.1@475,200
NetR1_1: R1.1 R2.2 U1.2 | length 240.1
  Top Layer w10: U1.2 685,735 705,715 742.5,715 762.5,695 R2.2 757.06,675.06 R1.1
NetR4_1: R4.1 R5.2 U1.6 | length 570.9
  Top Layer w10: v1(590,835) 590,720 622.5,687.5 R5.2 ; v1(700,845) 715,860 737.65,860 755,877.35 755,935 735,955 U1.6
  Top Layer w20: U1.6 R4.1@735,1078
  Bottom Layer w10: v1(590,835) 700,835 v1(700,845)
NetR17_1: R17.1 U3.26 | length 253.5
  Top Layer w10: U3.26 1380.67,1605 1395.67,1620 1410,1620 1430,1600 1430,1590 1450,1570 R17.1@1558,1570
NetR20_2: R20.2 U3.33 U3.34 | length 159.3
  Top Layer w10: R20.2 1172.44,1610 1220,1610 1223.19,1606.81 U3.34 U3.33
NetU4_11: U4.11 Y2.2 | length 210.5
  Top Layer w10: U4.11 1560.47,735 1581.47,756 Y2.2
OUTL: C2.1 C22.1 U2.3 | length 1141.5
  Top Layer w10: C2.1 622,578 v1(645,555) ; v1(800,390) U2.3 800,255 825,230 990,230 1005,245 1220,245 1338,363 1338,400
  Bottom Layer w10: v1(645,555) 645,430 685,390 v1(800,390)
OUTR: C4.1 C23.1 U2.13 | length 836
  Top Layer w10: U2.13 850,465 870,445 1072.13,445 1077.13,450 v1(1085,450) ; v1(1100,340) 1265,340 1300,375 1300,425 1320,445 C23.1
  Top Layer w20: C4.1 850,582 U2.13
  Bottom Layer w10: v1(1085,450) 1085,380 1100,365 v1(1100,340)
PVDD: C39.1 JP4.2 P1.7 R16.2 R18.2 R30.2 TP3.1 U5.1 U5.3 | length 3801.2
  Top Layer w10: R18.2 1217.5,632.5 1205,620 v1(1205,515) 1370,515 v1(1450,595) ; R16.2@1612.5,1629.94 1757.66,1629.94 C39.1 1760,1512.8 1757.6,1510.39 1757.6,1467.4 1770,1455 1822.4,1455 1830,1462.6 1830,1507.99 1832.4,1510.39 1885,1457.8 1885,1210 1815,1140 v1(1810,1140)
  Top Layer w15: P1.7 80,195 130,245 505,245 520,230 R30.2 550,110 570,90 570,55 605,20 1160,20 1180,40 v1(1180,70)
  Bottom Layer w10: v1(1450,595) 1460,605 1460,670 1775,985 1775,1105 v1(1810,1140)
  Bottom Layer w15: v1(1180,70) 1180,490 v1(1205,515)
"PWM AUDIO": C38.2 R13.1 R29.2 | length 251.7
  Top Layer w10: R13.1 638,108 650,120 650,145 667.5,162.5 R29.2 712.5,162.5 730,145 730,125 747.5,107.5 C38.2
"PWM DAC": P3.2 R28.1 | length 141
  Top Layer w10: R28.1 973,162 1060,75 P3.2
"RADIO L": R11.1 U4.16 | length 331.1
  Top Layer w10: R11.1 1245,400 1279.79,434.79 1279.79,435 1321.92,477.13 1442.4,477.13 1480.43,515.16 U4.16
"RADIO R": R12.1 U4.15 | length 312.2
  Top Layer w10: R12.1 1270,465 1300,495 1435,495 1474.84,534.84 U4.15
SCLK: U3.11
SDIN: U3.12
VDDAMP: C9.1 C10.2 R6.2 R7.1 U1.8 | length 1515.4
  Top Layer w20: R7.1 500,705 v1@535,740 ; U1.8 635,955 685,905 v2(710,905) ; R6.2@915.06,1132.5 942.5,1132.5 947.87,1127.13 ; 947.87,1132.13 947.87,1092.13 957.5,1082.5 C10.2 1027.44,1040 1030,1040 C9.1 v2(1030,865)
  Bottom Layer w20: v1@535,740 1000,740 1030,770 v2(1030,865) 970,865 930,905 v2(710,905)
  other v1: 540,740
"VS DREQ": U3.8
"VS MISO": P2.6 U3.30 | length 257.8
  Top Layer w10: U3.30 1301.93,1626.93 1350,1675 1350,1750 P2.6 P2.6@1385,1775
"VS MOSI": P2.4 U3.29 | length 284
  Top Layer w10: U3.29 1321.61,1611.61 1385,1675 1385,1685 P2.4
"VS RST": U3.3
"VS SCK": P2.8 U3.28 | length 630.1
  Top Layer w10: P2.8 1295,1780 1350,1835 1500,1835 1530,1805 1530,1755 1430,1655 1390.28,1655 1341.3,1606.02 U3.28
"VS XCS": P2.10 U3.23 | length 700.8
  Top Layer w10: P2.10 1180,1730 1200,1710 v1(1205,1710) ; U3.23 1501.26,1488.74 v1(1520,1470)
  Bottom Layer w10: v1(1205,1710) 1500,1710 1515,1695 1515,1475 v1(1520,1470)
"VS XDCS": P2.12 U3.13 | length 984.1
  Top Layer w10: P2.12 1080,1775 1150,1705 v1(1160,1705) ; v1(1445,1245) 1445,1283.39 U3.13
  Bottom Layer w10: v1(1160,1705) 1180.37,1684.63 1470.37,1684.63 1495,1660 1494.63,1659.63 1494.63,1450.37 1510,1435 1510,1290 1485.37,1265.37 1479.49,1265.37 1479.12,1265 1455,1265 1445,1255 v1(1445,1245)
pads on no net: LINE_IN.0 P1.2 P1.5 P1.8 P2.3 P2.5 P2.7 P2.9 P2.11 P2.13 P2.14 P2.15 P2.16 P2.17 P2.18 P2.19 P2.20 P2.21 P2.22 P2.23 P2.24 P2.25 P2.26 P2.27 P2.28 P2.29 P2.30 P2.31 P2.32 P3.1 PHONE.0 U3.9 U3.10 U3.15 U3.27 U4.0 U4.8 U4.19 U4.20 U4.21 U4.22 U4.23 U5.4 Y2.
copper on no net: | length 186.6
  Top Layer w10: 309.98,50.02 309.98,35.02 320,25 435,25 465,55

## Polygon pours and split planes (outlines as drawn)
GND on Bottom Layer "Top Layer-No Net" (solid, shelved, pour order 1001): -2960,3495 3280,3495 3280,-1000 -2960,-1000 -2960,3495
GND on Top Layer "Top Layer-No Net" (solid, shelved, pour order 1000): -2960,3480 -2955,3485 3280,3485 3280,-1000 -2960,-1000 -2960,3485

## Silkscreen, mask and mechanical layers (free items; w line width, h text height)
Top Overlay:
  lines w10: 1735,20 1735,820 ; 0,5 1960,5 1965,10 1965,1960 5,1960 0,1955 0,5